# EAGLE board Multiplexer_Circuit_Manual (EAGLE 9.3.0)
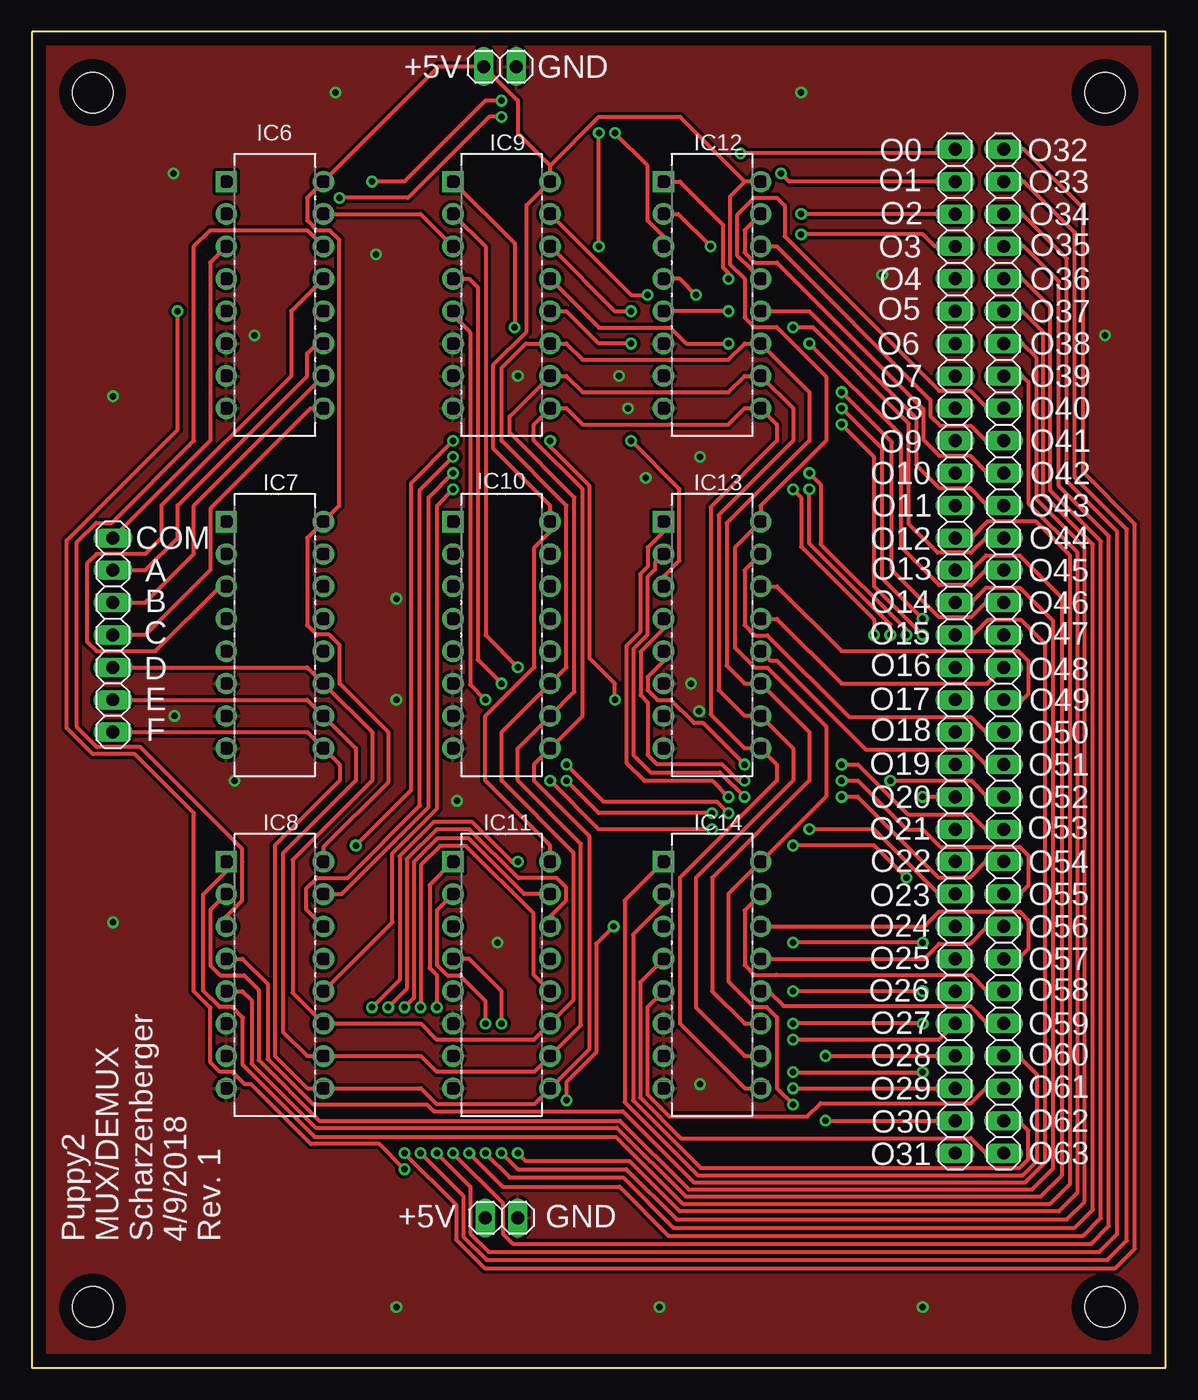
[diagram p0: board, top side]
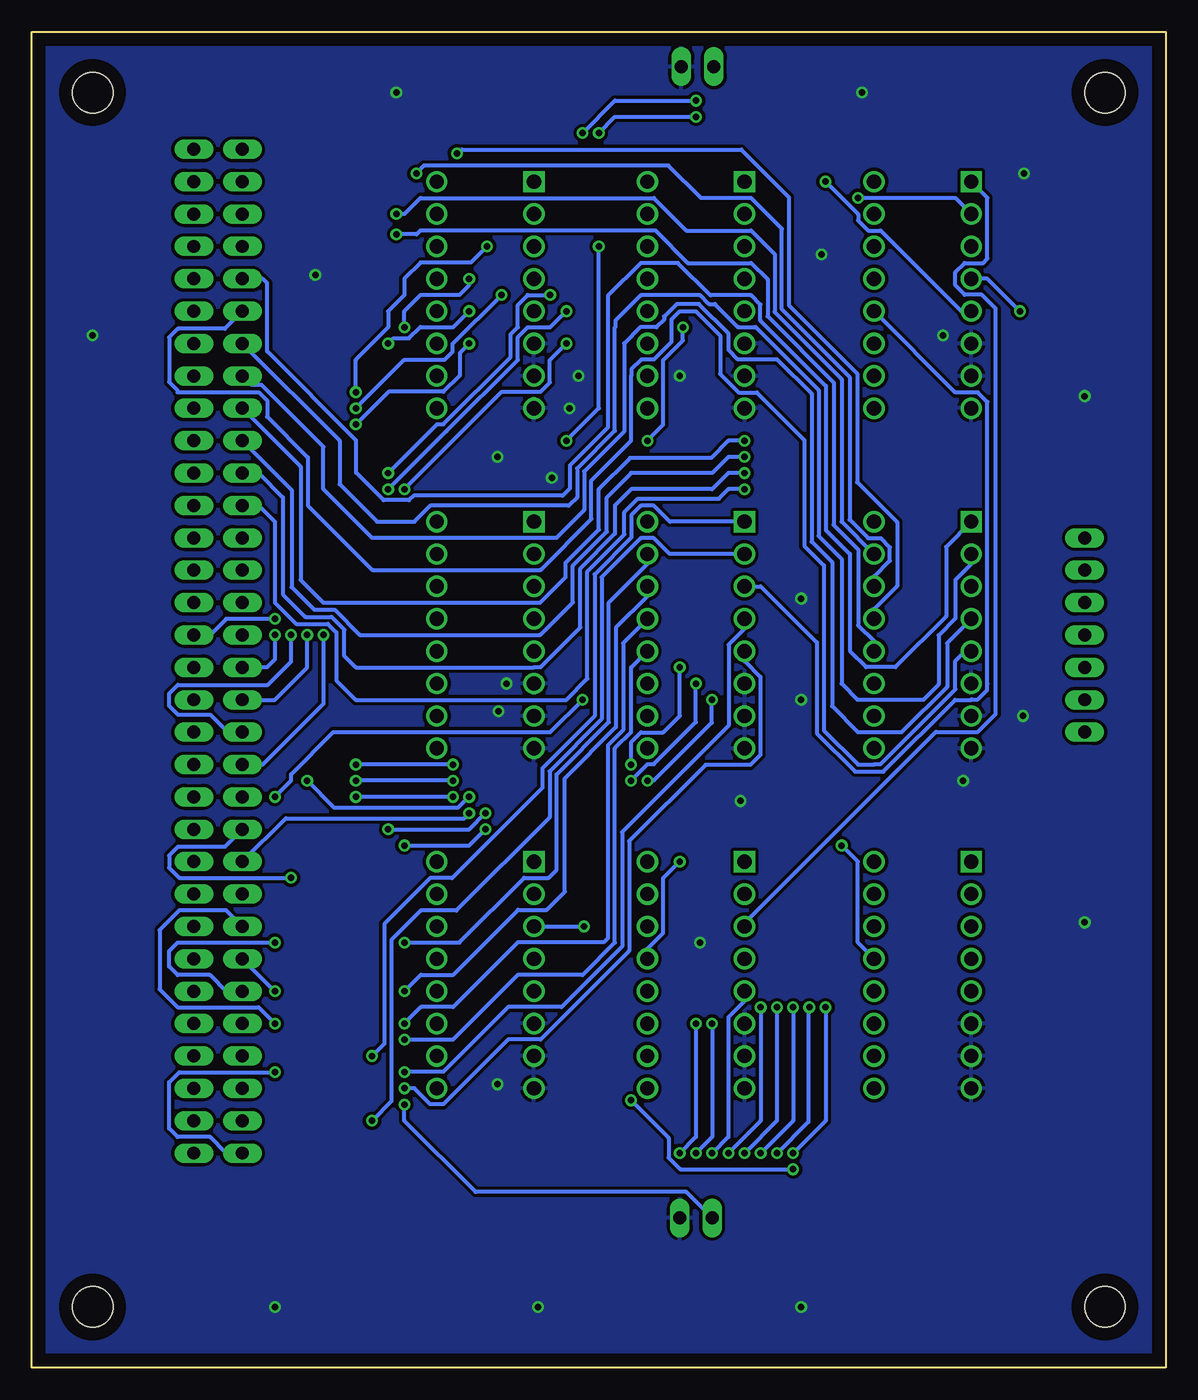
[diagram p1: board, bottom side, seen from below]

Size 88.9 x 104.78 mm. Coordinates in mm from the lower left corner, seen from the top.
Outline: 0,0 88.9,0 88.9,104.78 0,104.78 0,0
Copper layers (1*16): Top 0.035mm / dielectric 1.5mm / Bottom 0.035mm
Design rules "default": minimum track width 6mil, minimum drill 0.35mm, track to track 6mil, track to pad 6mil, pad to pad 6mil, via to via 6mil, smd to smd 6mil, copper to edge 40mil, drill to drill 6mil, minimum pad ring 10mil, minimum via ring 8mil, stop-mask expansion 4mil, vias tented up to drill 0mil, thermal gap 10mil
Net classes: 0 default: width 0.305 mm, drill 0.508 mm, clearance 0.254 mm
Holes 3.17 mm at 4.76,100.01 84.14,100.01 84.14,4.76 4.76,4.76

## Footprints (pad centres in the part's own frame; a part is rotated, then mirrored left to right if it is on the bottom)
DIP254P762X508-16 = drill 1.118 pad 1.676 square: 1 -7.62,17.78 | drill 1.118 pad 1.676: 2 -7.62,15.24; 3 -7.62,12.7; 4 -7.62,10.16; 5 -7.62,7.62; 6 -7.62,5.08; 7 -7.62,2.54; 8 -7.62,0; 9 0,0; 10 0,2.54; 11 0,5.08; 12 0,7.62; 13 0,10.16; 14 0,12.7; 15 0,15.24; 16 0,17.78
1X16 = drill 1.016 long: 1 -19.05,0; 2 -16.51,0; 3 -13.97,0; 4 -11.43,0; 5 -8.89,0; 6 -6.35,0; 7 -3.81,0; 8 -1.27,0; 9 1.27,0; 10 3.81,0; 11 6.35,0; 12 8.89,0; 13 11.43,0; 14 13.97,0; 15 16.51,0; 16 19.05,0
1X02 = drill 1.016 long: 1 -1.27,0; 2 1.27,0
1X07 = drill 1.016 long: 1 -7.62,0; 2 -5.08,0; 3 -2.54,0; 4 0,0; 5 2.54,0; 6 5.08,0; 7 7.62,0

## Placement (x,y rotation side)
IC6  CD4051BE  [DIP254P762X508-16]  22.86,75.25 0 top
IC7  CD4051BE  [DIP254P762X508-16]  22.86,48.58 0 top
IC8  CD4051BE  [DIP254P762X508-16]  22.86,21.91 0 top
IC9  CD4051BE  [DIP254P762X508-16]  40.64,75.25 0 top
IC10  CD4051BE  [DIP254P762X508-16]  40.64,48.58 0 top
IC11  CD4051BE  [DIP254P762X508-16]  40.64,21.91 0 top
IC12  CD4051BE  [DIP254P762X508-16]  57.15,75.25 0 top
IC13  CD4051BE  [DIP254P762X508-16]  57.15,48.58 0 top
IC14  CD4051BE  [DIP254P762X508-16]  57.15,21.91 0 top
JP1  [1X16]  72.39,76.52 90 top
JP2  [1X16]  72.39,35.88 90 top
JP3  [1X16]  76.2,76.52 90 top
JP4  [1X16]  76.2,35.88 90 top
JP5  [1X02]  36.7,102.04 0 top
JP6  [1X02]  36.83,11.75 0 top
JP7  [1X07]  6.35,57.47 270 top

## Library data of the parts
IC6-IC14 = SamacSys_Parts; DESCRIPTION: CMOS Single 8-Channel Analog Multiplexer/Demultiplexer with Logic-Level Conversion; HEIGHT: mm; MANUFACTURER_NAME: Texas Instruments; MANUFACTURER_PART_NUMBER: CD4051BE; MOUSER_PART_NUMBER: 595-CD4051BE
JP1-JP7 = pinhead

## Nets
+5V: IC6.16 IC7.16 IC8.16 IC9.16 IC10.16 IC11.16 IC12.16 IC13.16 IC14.16 JP5.1 JP6.1
A0: IC6.11 JP7.2
B0: IC6.10 JP7.3
C0: IC6.9 JP7.4
D0: IC7.11 IC8.11 IC9.11 IC10.11 IC11.11 IC12.11 IC13.11 IC14.11 JP7.5
E0: IC7.10 IC8.10 IC9.10 IC10.10 IC11.10 IC12.10 IC13.10 IC14.10 JP7.6
F0: IC7.9 IC8.9 IC9.9 IC10.9 IC11.9 IC12.9 IC13.9 IC14.9 JP7.7
GND: IC6.6 IC6.7 IC6.8 IC7.6 IC7.7 IC7.8 IC8.6 IC8.7 IC8.8 IC9.6 IC9.7 IC9.8 IC10.6 IC10.7 IC10.8 IC11.6 IC11.7 IC11.8 IC12.6 IC12.7 IC12.8 IC13.6 IC13.7 IC13.8 IC14.6 IC14.7 IC14.8 JP5.2 JP6.2
MUX00: IC7.13 JP1.16
MUX01: IC7.14 JP1.15
MUX02: IC7.15 JP1.14
MUX03: IC7.12 JP1.13
MUX04: IC7.1 JP1.12
MUX05: IC7.5 JP1.11
MUX06: IC7.2 JP1.10
MUX07: IC7.4 JP1.9
MUX08: IC8.13 JP1.8
MUX09: IC8.14 JP1.7
MUX10: IC8.15 JP1.6
MUX11: IC8.12 JP1.5
MUX12: IC8.1 JP1.4
MUX13: IC8.5 JP1.3
MUX14: IC8.2 JP1.2
MUX15: IC8.4 JP1.1
MUX16: IC9.13 JP2.16
MUX17: IC9.14 JP2.15
MUX18: IC9.15 JP2.14
MUX19: IC9.12 JP2.13
MUX20: IC9.1 JP2.12
MUX21: IC9.5 JP2.11
MUX22: IC9.2 JP2.10
MUX23: IC9.4 JP2.9
MUX24: IC10.13 JP2.8
MUX25: IC10.14 JP2.7
MUX26: IC10.15 JP2.6
MUX27: IC10.12 JP2.5
MUX28: IC10.1 JP2.4
MUX29: IC10.5 JP2.3
MUX30: IC10.2 JP2.2
MUX31: IC10.4 JP2.1
MUX32: IC11.13 JP3.16
MUX33: IC11.14 JP3.15
MUX34: IC11.15 JP3.14
MUX35: IC11.12 JP3.13
MUX36: IC11.1 JP3.12
MUX37: IC11.5 JP3.11
MUX38: IC11.2 JP3.10
MUX39: IC11.4 JP3.9
MUX40: IC12.13 JP3.8
MUX41: IC12.14 JP3.7
MUX42: IC12.15 JP3.6
MUX43: IC12.12 JP3.5
MUX44: IC12.1 JP3.4
MUX45: IC12.5 JP3.3
MUX46: IC12.2 JP3.2
MUX47: IC12.4 JP3.1
MUX48: IC13.13 JP4.16
MUX49: IC13.14 JP4.15
MUX50: IC13.15 JP4.14
MUX51: IC13.12 JP4.13
MUX52: IC13.1 JP4.12
MUX53: IC13.5 JP4.11
MUX54: IC13.2 JP4.10
MUX55: IC13.4 JP4.9
MUX56: IC14.13 JP4.8
MUX57: IC14.14 JP4.7
MUX58: IC14.15 JP4.6
MUX59: IC14.12 JP4.5
MUX60: IC14.1 JP4.4
MUX61: IC14.5 JP4.3
MUX62: IC14.2 JP4.2
MUX63: IC14.4 JP4.1
MUXOUT: IC6.3 JP7.1
N$3: IC6.13 IC7.3
N$6: IC6.14 IC8.3
N$7: IC6.15 IC9.3
N$8: IC6.12 IC10.3
N$9: IC6.1 IC11.3
N$10: IC6.5 IC12.3
N$12: IC6.2 IC13.3
N$13: IC6.4 IC14.3

## Tracks (layer width: path | path; a pad name or v marks a point on that pad's centre or on a via)
+5V  (via drill 0.51)
  Top 0.305: IC8.16 22.86,40.83 27.94,45.91 27.94,49.85 24.13,53.66 24.13,56.69 23.32,57.49 22.34,57.49 21.59,58.25 21.59,65.09 IC7.16 24.11,67.6 24.11,88.46 23.38,89.19 22.39,89.19 21.59,90 21.59,91.76 IC6.16 31.88,102.04 JP5.1 38.1,99.38 38.1,96.84 40.64,94.3 | IC11.16 40.64,40.96 35.56,46.04 35.56,51.12 39.4,54.95 39.4,64.33 40.64,65.58 IC10.16 40.64,67.63 36.2,72.07 36.2,78.68 38.8,81.28 38.8,91.19 IC9.16 40.64,94.3 | IC12.16 55.9,93.03 | 55.9,93.03 54.74,91.87 54.74,86.55 55.88,85.41 55.88,82.38 56.63,81.62 58.4,81.62 62.28,77.74 62.28,72.73 57.15,67.6 IC13.16 55.12,64.33 55.12,56.47 56.69,54.9 57.67,54.9 62.28,50.29 62.28,44.79 57.18,39.69 IC14.16 54.61,37.15 54.61,30.31 56.66,28.26 57.64,28.26 58.42,27.48 58.42,21.91 v59.69,20.64 | 55.9,93.03 50.84,98.08 44.42,98.08 40.64,94.3
  Bottom 0.305: JP6.1 37.59,13.78 54.1,13.78 59.69,19.37 v59.69,20.64
A0
  Top 0.305: IC6.11 22.37,80.33 21.59,79.55 21.59,77.79 11.43,67.63 11.43,65.09 8.89,62.55 JP7.2
B0
  Top 0.305: JP7.3 8.89,60.01 12.7,63.82 12.7,67.63 IC6.10
C0
  Top 0.305: IC6.9 21.88,75.25 13.99,67.36 13.99,62.57 8.89,57.47 JP7.4
D0
  Top 0.305: IC14.11 55.88,26.99 53.34,29.53 53.34,38.42 60.96,46.04 60.96,49.85 IC13.11 55.88,53.66 54.48,55.05 54.48,66.23 60.96,72.71 60.96,76.52 IC12.11 55.88,80.33 54.61,79.06 43.18,79.06 41.91,80.33 IC9.11 38.73,80.33 36.83,78.42 36.83,72.71 41.91,67.63 41.91,54.93 IC10.11 36.83,49.85 36.83,46.04 42.48,40.39 42.48,28.83 IC11.11 39.37,25.72 34.29,25.72 34.27,25.74 31.73,25.74 30.48,26.99 IC8.11 20.45,29.4 20.45,39.81 26.67,46.04 26.67,49.85 IC7.11 21.59,54.93 JP7.5
E0
  Top 0.305: IC14.10 55.88,24.45 52.07,28.26 52.07,38.42 59.69,46.04 59.69,48.58 IC13.10 55.88,51.12 53.85,53.15 53.85,66.86 59.69,72.71 59.69,75.25 IC12.10 55.88,77.79 54.61,76.52 43.18,76.52 41.91,77.79 IC9.10 37.47,74.61 37.47,73.34 42.55,68.26 42.55,53.02 IC10.10 38.1,48.58 38.1,46.04 43.05,41.08 43.05,26.86 IC11.10 39.4,23.2 31.74,23.2 30.5,24.45 IC8.10 21.59,24.45 19.68,26.35 19.68,40.32 25.4,46.04 25.4,48.58 IC7.10 21.59,52.39 JP7.6
F0
  Top 0.305: IC14.9 55.88,21.91 50.8,26.99 50.8,38.42 58.42,46.04 58.42,47.31 IC13.9 55.88,48.58 53.21,51.24 53.21,67.5 58.42,72.71 58.42,73.98 IC12.9 55.88,75.25 54.61,73.98 43.18,73.98 41.91,75.25 IC9.9 39.37,73.98 39.37,72.71 43.18,68.9 43.18,51.12 IC10.9 39.37,47.31 39.37,46.04 43.69,41.72 43.69,24.96 IC11.9 39.4,20.66 31.74,20.66 30.5,21.91 IC8.9 21.59,21.91 19.05,24.45 19.05,40.96 24.13,46.04 24.13,47.31 IC7.9 21.61,49.82 6.38,49.82 JP7.7
GND  (via drill 0.51)
  other vias: 33.34,44.45 36.51,33.34 15.88,46.04 52.39,22.23 26.99,87.31 11.18,51.12 28.57,52.39 28.57,60.33 52.39,71.44 46.74,75.25 6.35,76.2 11.11,93.66 23.81,100.01 17.46,80.96 60.33,100.01 66.67,85.72 69.85,4.76 28.57,4.76 84.14,80.96 6.35,34.92 52.32,51.5 48.13,69.79 51.69,53.66 46.04,77.79 38.1,77.79 49.21,4.76
  pour Top: -1.27,106.36 -1.27,-1.27 90.49,-1.27 90.49,106.36
  pour Bottom: -1.27,106.36 -1.27,-1.27 90.49,-1.27 90.49,106.36
MUX00  (via drill 0.51)
  Top 0.305: JP1.16 72.07,95.25 v55.56,95.25
  Bottom 0.305: IC7.13 22.86,59.52 21.06,61.32 21.06,66.31 24.19,69.45 24.19,77.98 29.54,83.33 29.54,91.8 33.28,95.54 33.26,95.55 55.16,95.55 55.46,95.25 v55.56,95.25
MUX01  (via drill 0.51)
  Top 0.305: JP1.15 59.37,93.03 v58.74,93.66
  Bottom 0.305: IC7.14 22.86,62.06 21.61,63.3 21.61,64.33 22.34,65.06 23.32,65.06 24.78,66.52 24.78,77.7 30.1,83.02 30.1,89.33 32.5,91.73 36.42,91.73 38.99,94.3 58.17,94.3 58.74,93.73 v58.74,93.66
MUX02  (via drill 0.51)
  Top 0.305: JP1.14 v60.33,90.49
  Bottom 0.305: IC7.15 25.4,66.35 25.4,77.53 30.66,82.79 30.66,87.34 32.5,89.19 37.58,89.19 40.12,91.73 58.4,91.73 58.42,91.76 59.69,90.49 v60.33,90.49
MUX03  (via drill 0.51)
  Top 0.305: JP1.13 70.8,87.95 69.85,88.9 v60.33,88.9
  Bottom 0.305: IC7.12 22.86,56.98 24.11,58.22 24.11,64.17 26.04,66.1 26.04,77.28 31.22,82.46 31.22,85.36 32.5,86.65 37.45,86.65 40.02,89.22 58.42,89.22 58.74,88.9 v60.33,88.9
MUX04
  Bottom 0.305: IC7.1 17.22,64.38 17.22,58.93 21.2,54.95 23.5,54.95 24.77,56.22 24.77,63.82 26.64,65.7 26.64,77 31.77,82.13 31.77,83.38 32.5,84.11 35.7,84.11 38.24,86.65 41.16,86.65 43.74,84.07 43.74,73.74 46.71,70.76 46.71,68.96 47.28,68.39 58.98,68.39 59.33,68.03 61.32,68.03 63.48,70.19 63.48,72.73 70.46,79.72 70.46,85.06 70.8,85.41 JP1.12
MUX05
  Bottom 0.305: JP1.11 73.76,81.5 77.45,81.5 78.13,80.81 78.13,77.3 77.47,76.64 77.47,76.52 71.12,76.52 70.46,75.86 70.46,74.59 67.26,71.39 67.26,67.63 62.2,62.57 49.01,62.57 45.02,66.57 45.02,69.6 41.91,72.71 41.91,77.79 41.88,77.81 41.88,78.3 41.1,79.08 40.12,79.08 38.76,80.45 38.76,82.21 38.1,82.87 36.83,82.87 34.92,80.96 34.92,77.93 33.48,76.49 32.06,76.49 28.32,72.75 28.32,64.45 26.79,62.92 26.79,49.98 24.12,47.31 22.86,47.31 22.84,47.33 22.34,47.33 16.48,53.19 16.48,55.44 15.73,56.2 IC7.5
MUX06
  Bottom 0.305: IC7.2 15.24,63.04 16.48,61.79 16.48,58.76 17.8,57.44 17.8,53.59 19,52.39 24.13,52.39 25.4,53.66 25.4,63.44 27.2,65.24 27.2,76.67 32.16,81.62 33.54,81.62 35.35,83.44 35.82,83.44 36.49,84.11 41.16,84.11 43.16,82.11 43.16,81.62 43.18,81.6 43.18,73.5 46.15,70.53 46.15,68.26 46.81,67.6 57.67,67.6 58.91,66.36 61.82,66.36 64.77,69.3 64.77,72.71 JP1.10
MUX07
  Bottom 0.305: IC7.4 17.14,56.83 17.14,53.4 20.7,49.85 24.13,49.85 26.16,51.88 26.16,63.18 27.76,64.78 27.76,76.39 30.46,79.08 33.53,79.08 34.27,79.81 34.27,81.09 36.6,83.43 38.33,83.43 39.32,82.44 39.32,82.21 39.93,81.6 41.2,81.6 42.47,80.33 42.47,73.42 45.59,70.29 45.59,67.28 47.78,65.09 62.23,65.09 66.04,68.9 66.04,72.23 70.89,77.08 71.68,77.08 JP1.9
MUX08  (via drill 0.51)
  Top 0.305: v33.02,72.71 33.02,72.66 29.74,69.38 29.74,45.3 v25.4,40.96
  Bottom 0.305: IC8.13 24.13,33.34 24.13,39.69 v25.4,40.96 | v33.02,72.71 34.29,72.71 35.64,71.36 41.99,71.36 44.45,68.9 44.45,65.72 47.04,63.13 47.04,62.01 49.04,60.01 66.04,60.01 67.82,61.78 67.82,70.67 JP1.8
MUX09  (via drill 0.51)
  Top 0.305: IC8.14 21.49,35.98 21.49,37.54 22.37,38.42 24.76,38.42 30.43,44.09 30.43,68.85 v33.02,71.44
  Bottom 0.305: v33.02,71.44 34.29,71.44 35.56,70.17 41.91,70.17 43.81,68.26 43.81,65.56 46.48,62.9 46.48,60.02 49.04,57.47 63.19,57.47 65.17,59.45 66.75,59.45 68.53,61.23 68.53,68.85 JP1.7
MUX10  (via drill 0.51)
  Top 0.305: v33.02,70.17 31.11,68.26 31.11,43.98 24.28,37.15 IC8.15
  Bottom 0.305: v33.02,70.17 34.29,70.17 35.56,68.9 41.91,68.9 43.18,67.63 43.18,65.41 45.9,62.69 45.9,58.07 49.01,54.95 49.51,54.95 49.53,54.93 63.5,54.93 64.39,55.82 64.39,57.88 65.4,58.89 67.46,58.89 69.22,60.64 69.22,68.26 71.12,70.17 JP1.6
MUX11  (via drill 0.51)
  Top 0.305: IC8.12 28.27,34.94 28.27,40.35 31.77,43.85 31.77,67.62 33.02,68.86 v33.02,68.9
  Bottom 0.305: v33.02,68.9 34.29,68.9 35.03,68.16 41.39,68.16 42.44,67.11 42.44,65.36 45.34,62.46 45.34,54.04 46.99,52.39 63.5,52.39 65.02,53.91 65.02,57.67 65.68,58.33 68.17,58.33 69.85,60.01 69.85,66.36 71.12,67.63 JP1.5
MUX12
  Top 0.305: IC8.1 15.24,38.91 13.41,37.08 13.41,29.6 14.72,28.28 15.71,28.28 16.54,27.45 16.54,23.73 22.17,18.1 45.79,18.1 51.02,12.87 79.86,12.87 81.41,14.41 81.41,63.69 78.74,66.36 74.93,66.36 73.66,65.09 JP1.4
MUX13
  Top 0.305: JP1.3 73.66,62.55 74.83,63.72 77.45,63.72 80.74,60.42 80.74,15.05 79.11,13.42 51.25,13.42 45.87,18.81 22.25,18.81 17.22,23.84 17.22,28.82 16.51,29.53 IC8.5
MUX14
  Top 0.305: JP1.2 73.66,60.01 74.83,61.18 77.45,61.18 80.07,58.55 80.07,15.62 78.44,13.98 51.49,13.98 46.1,19.37 22.54,19.37 17.78,24.13 17.78,29.64 16.64,30.77 14.78,30.77 13.99,31.55 13.99,35.9 IC8.2
MUX15
  Top 0.305: JP1.1 73.79,57.47 74.95,58.64 77.57,58.64 79.47,56.74 79.47,16.1 77.91,14.54 51.88,14.54 46.32,20.1 31.51,20.1 30.98,20.64 22.07,20.64 18.49,24.22 18.49,30.09 16.51,32.07 IC8.4
MUX16  (via drill 0.51)
  Top 0.305: v69.85,57.47 66.04,61.28 66.04,71.44 v63.5,73.98 | IC9.13 44.48,81.57 50.05,81.57 51.29,80.33 v54.61,80.33
  Bottom 0.305: v69.85,57.47 69.85,55.56 70.48,54.93 JP2.16 | v54.61,80.33 55.35,79.59 55.35,77.83 56.63,76.54 60.94,76.54 v63.5,73.98
MUX17  (via drill 0.51)
  Top 0.305: v67.31,57.47 67.31,58.29 60.96,64.64 v60.96,68.9 | IC9.14 45.72,82.87 v46.99,82.87
  Bottom 0.305: JP2.15 69.85,52.39 67.31,54.93 v67.31,57.47 | v46.99,82.87 48.26,81.6 50.02,81.6 50.8,80.82 50.8,79.05 56.4,73.44 56.41,73.44 v60.96,68.9
MUX18  (via drill 0.51)
  Top 0.305: v68.58,57.47 68.58,57.85 61.85,64.58 61.85,69.28 v60.96,70.17 | IC9.15 46.99,84.14 v48.26,84.14
  Bottom 0.305: v68.58,57.47 68.58,55.37 70.4,53.56 77.45,53.56 78.13,52.87 78.13,51.9 77.45,51.22 74.93,51.22 73.56,49.85 JP2.14 | v48.26,84.14 50.02,84.14 50.8,83.36 50.8,81.61 51.36,81.05 51.36,79.28 56.63,74 57.12,74 v60.96,70.17
MUX19  (via drill 0.51)
  Top 0.305: v46.99,80.33 44.45,80.33 41.91,82.87 IC9.12 | v59.69,68.9 60.33,68.26 60.33,64.39 66.04,58.67 v66.04,57.47
  Bottom 0.305: v66.04,57.47 66.04,52.07 70.8,47.31 JP2.13 | v46.99,80.33 48.28,79.03 48.28,77.27 49.01,76.54 52.05,76.54 v59.69,68.9
MUX20  (via drill 0.51)
  Top 0.305: IC9.1 37.85,88.2 v37.85,81.6 | JP2.12 v69.85,44.77 | v45.72,52.39 45.72,53.66 43.74,55.64 43.74,69.13 40.64,72.23 v40.64,72.71
  Bottom 0.305: v69.85,44.77 68.58,46.04 68.58,46.53 65.26,49.85 48.26,49.85 v45.72,52.39 | v40.64,72.71 39.4,73.95 39.4,79.02 37.85,80.57 v37.85,81.6
MUX21  (via drill 0.51)
  Top 0.305: IC9.5 33.02,82.55 34.37,81.2 34.37,53.58 v35.56,52.39 | v53.34,42.23 44.45,42.23 v40.64,46.04 | v59.69,40.96 66.04,40.96 v68.58,38.42
  Bottom 0.305: JP2.11 73.76,40.86 77.45,40.86 78.13,40.17 78.13,39.2 77.34,38.42 v68.58,38.42 | v40.64,46.04 40.15,46.04 35.59,50.6 35.59,52.36 v35.56,52.39 | v59.69,40.96 54.61,40.96 v53.34,42.23
MUX22  (via drill 0.51)
  Top 0.305: v38.1,54.93 35.57,57.45 35.57,87.94 IC9.2 | v54.61,43.5 53.72,44.39 44.83,44.39 v41.91,47.31
  Bottom 0.305: JP2.10 68.99,43.09 55.02,43.09 v54.61,43.5 | v41.91,47.31 41.88,47.33 41.88,49.09 41.16,49.82 39.4,49.82 38.1,51.12 v38.1,54.93
MUX23  (via drill 0.51)
  Top 0.305: IC9.4 34.29,85.41 34.95,84.75 34.95,55.54 v36.83,53.66 | v53.34,43.5 44.45,43.5 v41.91,46.04 | JP2.9 71.12,37.15 66.04,42.23 v60.96,42.23
  Bottom 0.305: v60.96,42.23 54.61,42.23 v53.34,43.5 | v41.91,46.04 40.62,47.33 40.12,47.33 36.83,50.63 v36.83,53.66
MUX24  (via drill 0.51)
  Top 0.305: v69.85,26.99 v59.69,26.99
  Bottom 0.305: v69.85,26.99 71.12,28.26 77.47,28.26 78.89,29.68 78.89,34.33 77.34,35.88 73.66,35.88 JP2.8 | IC10.13 42.55,56.83 42.55,50.01 43.74,48.82 43.74,33.69 44.06,33.36 50.79,33.36 55.87,28.28 58.4,28.28 v59.69,26.99
MUX25  (via drill 0.51)
  Top 0.305: v69.85,29.53 v59.69,29.53
  Bottom 0.305: JP2.7 v69.85,29.53 | v59.69,29.53 58.4,30.82 55.85,30.82 50.77,35.9 48.53,35.9 47.12,37.32 47.12,46.23 43.1,50.24 43.1,58.03 40.64,60.5 IC10.14
MUX26  (via drill 0.51)
  Top 0.305: v69.85,33.34 v59.69,33.34
  Bottom 0.305: JP2.6 73.66,29.53 74.93,30.8 77.47,30.8 78.13,31.46 78.13,32.68 77.47,33.34 v69.85,33.34 | v59.69,33.34 55.39,33.34 50.31,38.42 48.39,38.42 47.75,39.05 47.75,46.55 43.66,50.63 43.66,60.02 40.64,63.04 IC10.15
MUX27  (via drill 0.51)
  Top 0.305: JP2.5 71.12,25.72 v59.69,25.72
  Bottom 0.305: IC10.12 41.91,54.93 41.91,49.86 43.18,48.59 43.18,33.34 45.72,30.8 50.82,30.8 55.87,25.74 59.66,25.74 v59.69,25.72
MUX28  (via drill 0.51)
  Top 0.305: v62.23,24.45 JP2.4
  Bottom 0.305: IC10.1 38.88,66.36 40.12,67.6 41.16,67.6 41.88,66.87 41.88,65.12 44.78,62.23 44.78,51.1 48.87,47.01 48.87,45.48 55.95,38.39 57.67,38.39 61.27,34.79 61.27,25.41 v62.23,24.45
MUX29  (via drill 0.51)
  Top 0.305: v59.69,21.91 JP2.3
  Bottom 0.305: IC10.5 33.02,55.42 31.77,54.17 31.77,48.06 32.55,47.28 36.08,47.28 42.06,41.3 42.06,32.7 49.01,25.74 51.55,25.74 56.63,20.66 57.67,20.66 58.91,21.91 v59.69,21.91
MUX30  (via drill 0.51)
  Top 0.305: v62.23,19.37 JP2.2
  Bottom 0.305: IC10.2 38.88,63.82 40.12,65.06 41.16,65.06 44.22,62 44.22,50.87 48.31,46.78 48.31,43.16 55.62,35.85 58.4,35.85 60.71,33.54 60.71,20.89 v62.23,19.37
MUX31  (via drill 0.51)
  Top 0.305: v59.69,23.18 v69.85,23.18
  Bottom 0.305: JP2.1 73.66,16.83 74.93,18.1 77.47,18.1 78.13,18.76 78.13,22.39 77.34,23.18 v69.85,23.18 | IC10.4 33.02,57.96 34.27,56.71 34.27,50.36 42.62,42.01 42.62,33.02 47.36,28.28 51.55,28.28 56.63,23.2 59.66,23.2 v59.69,23.18
MUX32  (via drill 0.51)
  Top 0.305: v26.67,28.26 28.83,30.42 28.83,40.12 31.5,42.79 34.54,42.79 37.64,39.69 v38.1,39.69 | v29.21,16.83 33.27,12.76 33.27,10.04 35.5,7.81 84.96,7.81 86.49,9.34 86.49,66.17 82.42,70.23 82.42,90.93 77.79,95.57 JP3.16
  Bottom 0.305: IC11.13 40.64,32.85 39.4,34.09 39.4,38.39 v38.1,39.69 | v26.67,28.26 26.67,19.37 v29.21,16.83
MUX33  (via drill 0.51)
  Top 0.305: IC11.14 40.64,35.39 41.88,36.63 41.88,37.66 41.16,38.39 38.15,38.39 34.31,42.23 31.73,42.23 29.39,39.89 29.39,29.7 v27.94,28.26 | v30.48,16.83 33.83,13.47 33.83,10.27 35.66,8.45 84.33,8.45 85.85,9.97 85.85,65.75 81.79,69.81 81.79,89.03 77.79,93.03 JP3.15
  Bottom 0.305: v27.94,28.26 28.02,28.18 28.02,19.26 30.45,16.83 v30.48,16.83
MUX34  (via drill 0.51)
  Top 0.305: IC11.15 38.6,37.15 34.26,41.49 31.78,41.49 29.95,39.66 29.95,28.99 v29.21,28.26 | v31.75,16.83 34.39,14.19 34.39,10.5 35.81,9.08 83.69,9.08 85.09,10.48 85.09,65.6 81.15,69.53 81.15,87 77.66,90.49 JP3.14
  Bottom 0.305: v29.21,28.26 29.21,19.37 v31.75,16.83
MUX35  (via drill 0.51)
  Top 0.305: v30.48,28.26 30.5,28.28 30.5,39.42 32.01,40.93 34.03,40.93 39.34,35.61 39.34,30.82 IC11.12 | v33.02,16.83 36.93,12.92 36.93,10.5 37.72,9.72 83.06,9.72 84.45,11.11 84.45,65.22 80.52,69.15 80.52,85.22 77.79,87.95 JP3.13
  Bottom 0.305: v30.48,28.26 30.48,19.37 v33.02,16.83
MUX36  (via drill 0.51)
  Top 0.305: v31.75,28.26 31.75,30.79 31.19,31.35 31.19,37.86 IC11.1 | v34.29,16.83 36.93,14.19 46.08,14.19 49.91,10.35 82.42,10.35 83.82,11.75 83.82,64.83 79.86,68.8 79.86,83.21 77.66,85.41 JP3.12
  Bottom 0.305: v31.75,28.26 31.75,19.37 v34.29,16.83
MUX37  (via drill 0.51)
  Top 0.305: v35.56,16.83 37.47,14.92 46.35,14.92 50.29,10.99 81.79,10.99 83.19,12.38 83.19,64.58 79.3,68.47 79.3,81.23 77.66,82.87 JP3.11
  Bottom 0.305: IC11.5 33.02,28.75 34.29,27.48 34.29,18.1 v35.56,16.83
MUX38  (via drill 0.51)
  Top 0.305: IC11.2 31.75,35.88 31.75,31.58 32.55,30.77 33.54,30.77 35.56,28.75 v35.56,26.99 | v36.83,16.83 38.1,15.56 46.61,15.56 50.55,11.62 81.15,11.62 82.55,13.02 82.55,64.33 78.74,68.14 78.74,79.25 77.66,80.33 JP3.10
  Bottom 0.305: v35.56,26.99 35.56,18.1 v36.83,16.83
MUX39  (via drill 0.51)
  Top 0.305: JP3.9 77.66,77.79 78.13,77.32 78.13,67.79 81.97,63.96 81.97,13.7 80.52,12.26 50.8,12.26 46.86,16.19 38.73,16.19 v38.1,16.83 | v36.83,26.99 36.83,29.53 34.29,32.07 IC11.4
  Bottom 0.305: v38.1,16.83 36.83,18.1 v36.83,26.99
MUX40
  Top 0.305: IC12.13 56.44,86.12 56.43,86.12 55.32,87.23 55.32,90.42 56.66,91.76 58.42,91.76 59.03,91.15 59.03,88.73 71.14,76.62 73.56,76.62 74.93,75.25 JP3.8
MUX41
  Top 0.305: JP3.7 74.8,72.71 73.64,73.88 71.22,73.88 70.46,74.64 70.46,75.91 58.42,87.95 IC12.14
MUX42
  Top 0.305: IC12.15 55.88,89.22 55.88,87.46 56.66,86.68 58.42,86.68 69.9,75.2 69.9,72.78 71.14,71.54 73.56,71.54 74.93,70.17 JP3.6
MUX43
  Top 0.305: IC12.12 60.96,82.87 69.34,74.49 69.34,70.8 71.14,69 73.56,69 74.93,67.63 JP3.5
MUX44  (via drill 0.51)
  Top 0.305: IC12.1 50.8,93.03 54.18,89.65 54.18,86.32 54.61,85.89 v54.61,85.41 | v59.69,81.6 61.21,81.6 68.77,74.04 68.77,66.17 71.02,63.92 73.64,63.92 74.8,65.09 JP3.4
  Bottom 0.305: v59.69,81.6 59.69,82.87 58.4,84.16 55.36,84.16 54.61,84.92 v54.61,85.41
MUX45  (via drill 0.51)
  Top 0.305: JP3.3 74.8,62.55 73.64,61.38 71.14,61.38 68.15,64.38 68.15,73.14 v60.96,80.33 | v54.61,82.87 IC12.5
  Bottom 0.305: v60.96,80.33 60.55,80.73 59.33,80.73 58.44,81.62 55.85,81.62 v54.61,82.87
MUX46  (via drill 0.51)
  Top 0.305: IC12.2 50.67,90.49 v53.21,87.95 | JP3.2 74.8,60.01 73.64,58.84 71.14,58.84 67.44,62.55 67.44,72.58 v63.5,76.52
  Bottom 0.305: v63.5,76.52 63.5,79.06 60.96,81.6 60.96,82.87 59.69,84.14 59.69,85.41 58.42,86.68 54.48,86.68 v53.21,87.95
MUX47  (via drill 0.51)
  Top 0.305: v69.85,58.74 66.67,61.91 66.67,72.07 v63.5,75.25 | v52.07,84.14 50.8,85.41 IC12.4
  Bottom 0.305: v69.85,58.74 73.66,58.74 74.93,57.47 JP3.1 | v63.5,75.25 59.69,79.06 56.53,79.06 55.91,79.69 55.91,80.3 v52.07,84.14
MUX48
  Top 0.305: IC13.13 58.42,58.74 63.5,53.66 74.93,53.66 JP4.16
MUX49
  Top 0.305: IC13.14 58.42,61.28 63.5,56.2 77.34,56.2 78.13,55.41 78.13,52.86 77.66,52.39 JP4.15
MUX50
  Top 0.305: IC13.15 55.88,62.55 55.88,58.25 56.69,57.44 57.67,57.44 64.09,51.02 73.64,51.02 74.8,49.85 JP4.14
MUX51
  Top 0.305: IC13.12 57.89,55.46 58.41,55.46 65.39,48.48 73.64,48.48 74.8,47.31 JP4.13
MUX52  (via drill 0.51)
  Top 0.305: IC13.1 49.53,65.58 48.28,64.33 48.28,62.83 47.7,62.24 47.7,57.71 46.61,56.62 46.61,47.43 48.01,46.04 53.34,46.04 v54.61,44.77 | v67.31,46.04 73.66,46.04 74.93,44.77 JP4.12
  Bottom 0.305: v54.61,44.77 54.66,44.77 55.52,43.9 65.18,43.9 v67.31,46.04
MUX53  (via drill 0.51)
  Top 0.305: IC13.5 49.53,55.42 48.28,54.17 48.28,53.14 49.06,52.36 50.11,52.36 51.92,50.55 52.64,50.55 v55.88,47.31 | v63.5,47.31 64.77,47.31 68.68,43.4 73.64,43.4 74.8,42.23 JP4.11
  Bottom 0.305: v55.88,47.31 v63.5,47.31
MUX54  (via drill 0.51)
  Top 0.305: v55.88,44.77 53.95,46.7 48.51,46.7 47.17,48.04 47.17,56.39 48.26,57.48 48.26,62.01 48.84,62.59 48.84,63.13 IC13.2 | JP4.10 74.8,39.69 73.53,38.42 71.12,38.42 64.77,44.77 v63.5,44.77
  Bottom 0.305: v55.88,44.77 v63.5,44.77
MUX55  (via drill 0.51)
  Top 0.305: IC13.4 49.53,57.96 47.73,56.15 47.73,52.75 48.28,52.19 48.28,48.06 49.01,47.33 54.1,47.33 55.4,46.04 v55.88,46.04 | v63.5,46.04 64.77,46.04 68.58,42.23 69.85,42.23 71.22,40.86 77.45,40.86 78.13,40.17 78.13,37.81 77.47,37.15 JP4.9
  Bottom 0.305: v55.88,46.04 v63.5,46.04
MUX56
  Top 0.305: IC14.13 69.98,32.07 71.14,33.24 73.56,33.24 74.93,34.61 JP4.8
MUX57
  Top 0.305: IC14.14 69.98,34.61 71.14,35.78 77.45,35.78 78.13,35.09 78.13,32.85 77.34,32.07 JP4.7
MUX58
  Top 0.305: IC14.15 55.88,35.88 55.88,31.58 56.63,30.82 58.4,30.82 58.42,30.8 73.66,30.8 74.93,29.53 JP4.6
MUX59
  Top 0.305: IC14.12 57.78,29.53 58.95,28.36 73.56,28.36 74.93,26.99 JP4.5
MUX60
  Top 0.305: IC14.1 46.48,36.64 46.48,20.82 52.21,15.1 77.68,15.1 78.82,16.24 78.82,22.98 77.34,24.45 JP4.4
MUX61
  Top 0.305: JP4.3 74.8,21.91 73.64,20.74 61.85,20.74 60.81,19.7 49.98,19.7 48.26,21.42 48.26,28.26 IC14.5
MUX62
  Top 0.305: JP4.2 77.34,19.37 78.13,18.58 78.13,16.34 77.45,15.66 52.44,15.66 47.14,20.95 47.14,33.98 49.53,36.37 IC14.2
MUX63
  Top 0.305: IC14.4 49.53,32.05 47.7,30.22 47.7,21.19 50.89,18 73.64,18 74.8,16.83 JP4.1
MUXOUT
  Top 0.305: JP7.1 13.97,72.71 13.97,86.68 IC6.3
N$3
  Top 0.305: IC6.13 22.17,84.72 22.16,84.72 20.32,82.88 20.32,77.79 10.16,67.63 10.16,65.09 8.89,63.82 5.08,63.82 4.32,63.06 4.32,56.96 5.08,56.2 9.68,56.2 14.76,61.28 IC7.3
N$6
  Top 0.305: IC8.3 15.24,35.39 16.48,36.63 16.48,39.66 16.51,39.69 16.48,39.71 16.48,40.69 8.5,48.68 5.1,48.68 3.53,50.25 3.53,64.75 5.04,66.26 6.25,66.26 12.7,72.71 12.7,87.95 13.97,89.22 21.58,89.22 22.16,88.63 22.17,88.63 IC6.14
N$7
  Top 0.305: IC6.15 30.48,90.49 IC9.3
N$8
  Bottom 0.305: IC10.3 31.75,61.28 27.35,56.88 27.35,49.75 24.35,46.75 22.14,46.75 16.5,52.39 15.24,52.39 15.21,52.41 14.72,52.41 13.99,53.14 13.99,53.63 13.97,53.66 13.97,75.74 14.72,76.49 16.48,76.49 IC6.12
N$9
  Bottom 0.305: IC11.3 33.02,34.88 18.03,49.87 14.72,49.87 13.34,51.26 13.34,83.08 14.42,84.16 15.76,84.16 16.48,84.89 16.48,85.92 15.76,86.65 14.31,86.65 13.97,87 13.97,91.76 IC6.1
N$10  (via drill 0.51)
  Top 0.305: IC12.3 49.53,88.73 48.28,89.97 48.28,94.27 v45.72,96.84 | v36.83,99.38 35.56,99.38 29.21,93.03 v26.67,93.03
  Bottom 0.305: v45.72,96.84 43.18,99.38 v36.83,99.38 | IC6.5 16.02,82.87 22.34,89.19 23.32,89.19 24.11,89.97 24.11,90.46 v26.67,93.03
N$12  (via drill 0.51)
  Top 0.305: IC13.3 49.53,62.06 50.77,63.3 50.77,68.92 v46.99,72.71 | v44.45,87.95 v44.45,96.84 | v24.13,91.76 29.5,91.76 35.85,98.11 v36.83,98.11
  Bottom 0.305: v46.99,72.71 44.45,75.25 v44.45,87.95 | v44.45,96.84 43.18,98.11 v36.83,98.11 | v24.13,91.76 16.51,91.76 IC6.2
N$13  (via drill 0.51)
  Top 0.305: v45.62,34.61 44.25,33.24 44.25,24.72 41.91,22.39 v41.91,20.97 | v29.21,15.56 27.23,17.54 21.87,17.54 17.19,22.23 16.68,22.23 15.71,23.2 14.72,23.2 13.99,23.93 13.99,28.22 12.7,29.52 12.7,43.5 8.08,48.12 4.78,48.12 2.73,50.16 2.73,64.89 11.43,73.59 v11.43,82.87
  Bottom 0.305: IC14.3 v45.62,34.61 | v41.91,20.97 38.96,18.02 38.96,16.47 38.05,15.56 v29.21,15.56 | v11.43,82.87 13.97,85.41 IC6.4

## Text on the board
tPlace: +5V | GND | O0 | O32 | O1 | O33 | O2 | O34 | O3 | O35 | O4 | O36 | O5 | O37 | O6 | O38 | O7 | O39 | O8 | O40 | O9 | O41 | O10 | O42 | O11 | O43 | COM | O12 | O44 | A | O13 | O45 | B | O14 | O46 | C | O15 | O47 | D | O16 | O48 | E | O17 | O49 | F | O18 | O50 | O19 | O51 | O20 | O52 | O21 | O53 | O22 | O54 | O23 | O55 | O24 | O56 | O25 | O57 | O26 | O58 | O27 | O59 | O28 | O60 | O29 | O61 | O30 | O62 | O31 | O63 | +5V | GND | Puppy2 / MUX/DEMUX / Scharzenberger / 4/9/2018 / Rev. 1